# Altium PCB picphlipvfdnew.PcbDoc (part 2 of 2)
Units mm, origin at the board's own origin, x right, y up, seen from the top; angles counter-clockwise.
Board outline 243.3 x 58.75 mm, 4 copper layers (Top Layer, Internal Plane 1, Internal Plane 2, Bottom Layer); 81 components, 82 nets, 400 pads, 146 vias.
Unrouted connection lines stored in the file: 61.
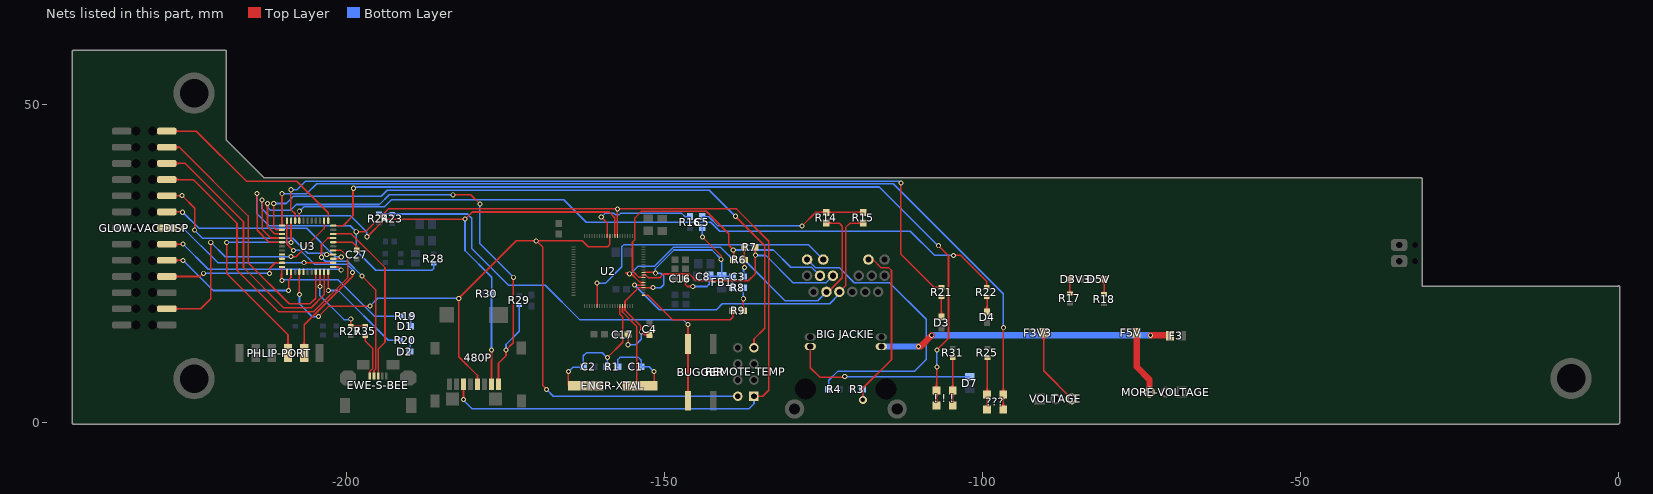
[diagram p4: the nets of this part, all layers, seen from the top]

## Via types
v1: diameter 0.8, hole 0.5, Top Layer to Bottom Layer, 145 vias
v2: diameter 1.27, hole 0.711, Top Layer to Bottom Layer, 1 vias

## Nets (pads, with @x,y where several pads share a name; then routed paths per layer and width w, separated by ;. In a path a pad name is that pad's centre, name@x,y a point inside that pad or via, vN(x,y) a via of type N, cw(c..) or ccw(c..) an arc to the next point about the centre after c; other vN are vias at no path point) (continued)
GNDA: C3.1 C4.2 C5.2 C8.2 C16.2 C17.2 FB1.1 R8.1 U2.4 U2.10 U2.77 | length 60.8
  Top Layer w0.25: C17.2@-155.8,13.9 v1(-155.8,12.288) v1@-155.715,12.203 ; U2.10@-153.376,23.678 -151.603,23.678 v1@-151.575,23.65 ; C4.2@-152.702,13.647 ccw(c-153.275,13.124) -153.275,13.9 ; C4.2@-152.702,14.153 cw(c-153.275,14.676) -153.275,13.9 ; C4.2@-152.425,13.9 -153.275,13.9 ; v1(-151.9,21.3) -151.922,21.278 U2.4@-153.376,21.278 -154.147,21.278 -156.276,19.149 U2.77@-156.276,18.378 -156.276,17.701 -153.775,15.2 -153.775,14.4 -153.275,13.9 ; C16.2@-147.034,22.378 cw(c-147.608,21.775) -146.775,21.775 ; C16.2@-146.775,22.65 -146.775,21.775 ; C16.2@-146.516,22.378 ccw(c-145.942,21.775) -146.775,21.775 ; v1(-145.615,21.453) -146.453,21.453 -146.775,21.775 ; v1(-144.09,29.228) -141.175,26.313 v1@-141.175,25.775
  Bottom Layer w0.25: v1(-155.8,12.288) -154.587,12.288 -153.725,13.15 v1@-153.725,14.3 ; v1(-151.9,21.3) -151.875,21.275 -150.65,21.275 -150.2,21.725 -150.2,23.1 -150.65,23.55 v1(-151.5,23.55) -151.5,24.275 -148.575,27.2 -142.6,27.2 -141.075,25.675 FB1.1@-141.075,23.05 -139.675,23.05 -139.425,23.3 R8.1@-139.425,21.3 ; v1(-145.615,21.453) -143.372,21.453 -143.025,21.8 C8.2@-143.025,23.025 -141.6,23.025 FB1.1@-141.3,23.325 ; v1@-144.125,29.3 C5.2@-144.125,30.95
  other v1: -153.715,14.328 -141.165,25.728
LINK_LED: "BIG JACKIE.15" U2.66 | length 44.9
  Top Layer w0.25: U2.66@-160.676,18.378 -160.676,22.161 -160.675,22.16 v1(-160.675,22.025)
  Bottom Layer w0.25: v1@-160.675,21.975 -159.363,21.975 -156.775,24.563 -156.775,27.716 -156.503,27.988 -127.401,27.988 -125.106,25.693 ; v1(-160.675,22.025) v1@-160.675,22.16
MISO: 480P.6 R28.1 REMOTE-TEMP.1 U2.27 U3.27 | length 196.9
  Top Layer w0: v1@-157.502,33.402 v1@-157.475,33.375
  Top Layer w0.25: v1(-214.15,36.075) -214.119,36.044 -214.119,30.279 -212.265,28.425 U3.27@-210.225,28.425 ; v1(-198.55,30.05) -197.1,30.05 -193.5,33.65 -138.75,33.65 -133.675,28.575 -133.675,5.125 -134.6,4.2 REMOTE-TEMP.1@-136,4.2 ; v1@-181.734,3.62 v1(-181.675,3.68) 480P.6@-181.675,6.05 ; v1@-157.502,33.675 v1(-157.477,33.65) ; U2.27@-157.476,29.378 v1@-157.476,33.402
  Bottom Layer w0.25: v1(-214.15,36.075) -214.15,32.875 -212.275,31 -199.5,31 v1(-198.55,30.05) -198.55,27.075 -195.475,24 -186.675,24 -186.375,24.3 R28.1@-186.375,25.1 ; v1(-181.675,3.68) -181.734,3.62 -180.314,2.2 -136.825,2.2 -136,3.025 REMOTE-TEMP.1@-136,4.2
MOSI: 480P.2 R30.2 U2.28 U3.26 | length 99.9
  Top Layer w0.25: v1@-213.5,35.075 -213.35,34.925 -213.35,30.45 -211.975,29.075 U3.26@-210.225,29.075 ; v1@-196.875,29.2 -194.022,32.053 v1(-181.44,32.053) ; v1@-181.275,32.2 -180.3,33.175 -158.775,33.175 -157.876,32.276 U2.28@-157.876,29.378 ; 480P.2@-177.275,6.05 v1(-177.275,11.45)
  Bottom Layer w0.25: v1(-213.375,35.075) -213.375,33.675 -212.296,32.596 -199.446,32.596 -196.925,30.075 v1@-196.925,29.375 ; v1(-181.44,32.053) -181.44,27.115 -177.25,22.925 R30.2@-177.25,20.35 ; v1(-177.275,11.45) -177.275,20.275 R30.2@-177.175,20.375
  other v1: -196.865,29.278
NetC3_2: C3.2 R6.2 R7.2 | length 7.4
  Top Layer w0.25: R7.2@-137.79,27.36 cw(c-138.43,26.72) -137.525,26.72 cw(c-136.62,26.72) R7.2@-137.26,27.36 ; R6.2@-137.765,25.89 ccw(c-138.345,26.47) -137.525,26.47 ; R6.2@-137.525,25.65 R7.2@-137.525,27.625 ; -137.525,26.591 ccw(c-136.534,26.591) R6.2@-137.235,25.89 ; v1@-137.5,24.5 R6.2@-137.5,25.625
  Bottom Layer w0.25: C3.2@-137.65,23.025 -137.65,24.275 v1(-137.5,24.425)
NetC5_1: C5.1 R14.1 R15.1 | length 31.1
  Top Layer w0.25: v1(-128.445,30.976) -126.295,33.126 R14.1@-124.655,33.126 R15.1@-118.813,33.126 ; R14.1@-124.92,32.861 ccw(c-125.56,32.221) -125.56,33.126 ccw(c-125.56,34.031) R14.1@-124.92,33.391 ; R14.1@-124.39,32.861 cw(c-123.75,32.221) -123.75,33.126 cw(c-123.75,34.031) R14.1@-124.39,33.391 ; R15.1@-119.078,32.861 ccw(c-119.718,32.221) -119.718,33.126 ccw(c-119.718,34.031) R15.1@-119.078,33.391
  Bottom Layer w0.25: C5.1@-144.125,32.425 -143.1,32.425 -141.651,30.976 v1(-128.445,30.976)
NetC27_2: C27.2 U3.7 | length 5.5
  Top Layer w0.25: U3.7@-202.175,28.425 -199.125,28.425 -198.475,27.775 ; C27.2@-198.661,27.353 ccw(c-199.048,27.775) -198.475,27.775 ; C27.2@-198.475,27.15 -198.475,27.775 ; C27.2@-198.289,27.353 cw(c-197.902,27.775) -198.475,27.775
NetD1_1: D1.1 R19.2 | length 1.6
  Bottom Layer w0.25: D1.1@-190,15.175 R19.2@-190,16.75
NetD2_1: D2.1 R20.2 | length 1.8
  Bottom Layer w0.25: D2.1@-190.075,11.225 R20.2@-190.075,13
NetD3_1: D3.1 R21.2 | length 5.5
  Top Layer w0.25: D3.1@-106.765,16.94 ccw(c-107.345,17.52) -106.525,17.52 ; R21.2@-106.659,19.666 cw(c-106.983,19.342) -106.525,19.342 ; -106.525,17.641 ccw(c-105.534,17.641) D3.1@-106.235,16.94 ; -106.525,19.222 cw(c-105.896,19.222) R21.2@-106.341,19.666 ; D3.1@-106.5,16.625 -106.5,16.676 -106.525,16.676 -106.525,19.825 R21.2@-106.5,19.825
NetD3V3_1: D3V3.1 R17.2 | length 4.5
  Top Layer w0.25: D3V3.1@-86.591,22.338 cw(c-87.231,21.698) -86.326,21.698 cw(c-85.421,21.698) D3V3.1@-86.061,22.338 ; R17.2@-86.459,20.509 ccw(c-86.781,20.831) -86.326,20.831 ; -86.326,20.956 ccw(c-85.694,20.956) R17.2@-86.141,20.509 ; D3V3.1@-86.326,22.603 -86.326,20.41 R17.2@-86.3,20.384
NetD4_1: D4.1 R22.2 | length 4.7
  Top Layer w0.25: D4.1@-99.615,17.79 ccw(c-100.287,18.462) -99.337,18.462 ; R22.2@-99.459,19.666 cw(c-99.754,19.371) -99.337,19.371 ; R22.2@-99.4,19.825 -99.337,19.825 -99.337,17.527 -99.35,17.514 D4.1@-99.35,17.475 ; -99.337,18.399 ccw(c-98.476,18.399) D4.1@-99.085,17.79 ; -99.337,19.193 cw(c-98.668,19.193) R22.2@-99.141,19.666
NetD5V_1: D5V.1 R18.2 | length 4.4
  Top Layer w0.25: D5V.1@-81.215,22.335 cw(c-81.913,21.637) -80.926,21.637 ; R18.2@-81.109,20.384 ccw(c-81.551,20.826) -80.926,20.826 ; R18.2@-80.926,20.434 D5V.1@-80.926,22.603 ; -80.926,20.71 ccw(c-80.465,20.71) R18.2@-80.791,20.384 ; -80.926,21.753 cw(c-80.103,21.753) D5V.1@-80.685,22.335
NetD7_2: "BIG JACKIE.P4" D7.2 | length 28.7
  Top Layer w0.25: -127.138,12.028 -127.138,8.688 -125.625,7.175 v1@-122.05,7.175
  Bottom Layer w0.25: v1(-121.725,7.275) D7.2@-102.1,7.275
NetF3_1: "BIG JACKIE.P3" F3.1 | length 45.9
  Top Layer w1: v1(-110.106,12.028) -109.797,12.028 v1(-108.05,13.775) ; v1(-73.625,13.775) -70.65,13.775 F3.1@-70.575,13.7
  Bottom Layer w1: -115.962,12.028 v1(-110.106,12.028) ; v1@-107.79,13.775 v1(-73.625,13.775) v1@-73.575,13.775
NetF3V3_1: F3V3.1 VOLTAGE.3 | length 15.2
  Top Layer w0.25: F3V3.1@-90.796,13.682 cw(c-91.692,12.786) -90.425,12.786 cw(c-89.158,12.786) F3V3.1@-90.054,13.682 ; F3V3.1@-90.619,13.859 cw(c-91.089,13.389) -90.425,13.389 cw(c-89.761,13.389) F3V3.1@-90.231,13.859 ; F3V3.1@-90.425,14.153 -90.425,8.19 VOLTAGE.3@-86.01,3.775
NetF5V_1: F5V.1 MORE-VOLTAGE.3 | length 10.1
  Top Layer w1: F5V.1@-75.826,14.153 -75.826,8.826 -73.79,6.79 MORE-VOLTAGE.3@-73.79,4.85
NetMCLR_1: BUGGER.1 R23.2 R24.1 | length 74.8
  Top Layer w0.25: BUGGER.1@-146.64,4.815 ccw(c-147.28,5.455) -146.375,5.455 ccw(c-145.47,5.455) BUGGER.1@-146.11,4.815 ; BUGGER.1@-146.64,11.085 cw(c-147.28,10.445) -146.375,10.445 cw(c-145.47,10.445) BUGGER.1@-146.11,11.085 ; BUGGER.1@-146.64,13.715 ccw(c-147.28,14.355) -146.375,14.355 ccw(c-145.47,14.355) BUGGER.1@-146.11,13.715 ; BUGGER.1@-146.375,3.5 BUGGER.1@-146.375,12.4 v1(-146.375,15.482)
  Bottom Layer w0.25: R24.1@-194.975,32.875 -194.95,32.85 R23.2@-192.9,32.85 -181.05,32.85 -180.375,32.175 -180.375,27.425 -174.6,21.65 -168.825,21.65 -163.425,16.25 -147.143,16.25 v1(-146.375,15.482)
NetP1_3: GLOW-VAC-DISP.3 U3.13 | length 39.9
  Top Layer w0.25: GLOW-VAC-DISP.3@-228.328,17.946 -223.004,17.946 -221.425,19.525 v1(-221.425,28.4) ; GLOW-VAC-DISP.3@-227.049,17.657 cw(c-226.351,16.96) -226.351,17.946 cw(c-226.351,18.932) GLOW-VAC-DISP.3@-227.049,18.235 ; v1@-208.825,26.1 -208.075,26.1 -203.6,30.575 U3.13@-203.6,31.8
  Bottom Layer w0.25: v1@-221.45,28.45 -219.15,26.15 v1(-208.825,26.15)
NetP1_7: GLOW-VAC-DISP.7 U3.32 | length 21.1
  Top Layer w0.25: GLOW-VAC-DISP.7@-228.328,23.026 -223.099,23.026 v1@-222.575,23.55 ; GLOW-VAC-DISP.7@-227.049,22.737 cw(c-226.351,22.04) -226.351,23.026 cw(c-226.351,24.012) GLOW-VAC-DISP.7@-227.049,23.315 ; v1(-212.165,23.503) -212.165,24.31 -211.3,25.175 U3.32@-210.225,25.175
  Bottom Layer w0.25: v1(-222.59,23.528) -212.153,23.528 -212.15,23.525 v1@-212.125,23.525
NetP1_9: GLOW-VAC-DISP.9 U3.35 | length 25.8
  Top Layer w0.25: GLOW-VAC-DISP.9@-228.328,25.566 -228.318,25.576 v1@-226.059,25.576 ; GLOW-VAC-DISP.9@-227.049,25.277 cw(c-226.327,24.555) -226.327,25.576 ; GLOW-VAC-DISP.9@-227.049,25.855 ccw(c-226.376,26.527) -226.376,25.576 ; v1(-209.175,20.825) -209.175,22.475 -209,22.65 -208.8,22.85 U3.35@-208.8,23.75
  Bottom Layer w0.25: v1@-226.059,25.576 -226.059,25.6 -225.8,25.6 -221.025,20.825 v1(-209.175,20.825)
  other v1: -225.8,25.55
NetP1_11: GLOW-VAC-DISP.11 U3.1 | length 32.2
  Top Layer w0.25: GLOW-VAC-DISP.11@-228.328,28.106 v1@-225.725,28.106 ; GLOW-VAC-DISP.11@-227.049,27.817 cw(c-226.351,27.12) -226.351,28.106 cw(c-226.351,29.092) GLOW-VAC-DISP.11@-227.049,28.395 ; U3.1@-202.175,24.525 -201.325,24.525 v1@-200.875,24.075
  Bottom Layer w0.25: v1(-225.775,28.125) -221.798,24.148 -200.941,24.148 v1@-200.872,24.078
  other v1: -200.915,24.053
NetP1_13: GLOW-VAC-DISP.13 U3.2 | length 30.3
  Top Layer w0.25: GLOW-VAC-DISP.13@-228.728,30.646 GLOW-VAC-DISP.13@-228.328,30.646 v1@-225.846,30.646 ; GLOW-VAC-DISP.13@-227.049,30.357 cw(c-226.351,29.66) -226.351,30.646 cw(c-226.351,31.632) GLOW-VAC-DISP.13@-227.049,30.935 ; v1(-206.775,25.2) -206.75,25.175 U3.2@-202.175,25.175
  Bottom Layer w0.25: v1(-225.775,30.65) -220.3,25.175 v1@-206.775,25.175
NetP1_15: GLOW-VAC-DISP.15 U3.3 | length 32
  Top Layer w0.25: GLOW-VAC-DISP.15@-228.328,33.186 -225.626,33.186 v1@-225.657,33.218 ; U3.3@-202.175,25.825 -201.175,25.825 v1(-200.9,26.1)
  Bottom Layer w0.25: v1@-225.657,33.218 -225.657,32.982 -223.275,30.6 -206.35,30.6 -201.85,26.1 v1@-200.85,26.1
  other v1: -225.85,33.125
NetP1_17: GLOW-VAC-DISP.17 U3.4 | length 31.8
  Top Layer w0.25: GLOW-VAC-DISP.17@-228.328,35.726 v1@-226.286,35.726 ; v1(-225.95,35.75) -223.95,33.75 v1(-223.95,30.325) ; v1(-203.179,26.475) U3.4@-202.175,26.475
  Bottom Layer w0.25: v1@-224.025,30.35 -222.72,29.045 -208.533,29.045 -206.181,26.694 -203.398,26.694 v1(-203.179,26.475)
NetP1_19: GLOW-VAC-DISP.19 U3.5 | length 51.2
  Top Layer w0.25: GLOW-VAC-DISP.19@-228.328,38.266 -224.166,38.266 -217.3,31.4 -217.3,24 -210.775,17.475 -205.25,17.475 -199.85,22.875 -199.85,26.1 -200.875,27.125 U3.5@-202.175,27.125 ; GLOW-VAC-DISP.19@-227.049,37.977 cw(c-226.351,37.28) -226.351,38.266 cw(c-226.351,39.252) GLOW-VAC-DISP.19@-227.049,38.555
NetP1_21: GLOW-VAC-DISP.21 U3.43 | length 44.3
  Top Layer w0.25: GLOW-VAC-DISP.21@-228.328,40.806 -225.456,40.806 -216.275,31.625 -216.275,24.425 -209.975,18.125 -205.625,18.125 -203.6,20.15 U3.43@-203.6,23.75 ; GLOW-VAC-DISP.21@-227.049,40.517 cw(c-226.351,39.82) -226.351,40.806 cw(c-226.351,41.792) GLOW-VAC-DISP.21@-227.049,41.095
NetP1_23: GLOW-VAC-DISP.23 U3.41 | length 44
  Top Layer w0.25: GLOW-VAC-DISP.23@-228.328,43.346 -226.346,43.346 -215.55,32.55 -215.55,25.175 -209.1,18.725 -205.8,18.725 -204.91,19.615 -204.91,21.745 -204.9,21.755 U3.41@-204.9,23.75 ; GLOW-VAC-DISP.23@-227.049,43.057 cw(c-226.351,42.36) -226.351,43.346 cw(c-226.351,44.332) GLOW-VAC-DISP.23@-227.049,43.635
NetP1_25: GLOW-VAC-DISP.25@-228.328,45.886 U3.12 | length 33.5
  Top Layer w0.25: GLOW-VAC-DISP.25@-228.328,45.886 -223.711,45.886 -215.815,37.99 -207.89,37.99 -202.95,33.05 U3.12@-202.95,31.8 ; GLOW-VAC-DISP.25@-227.049,45.597 cw(c-226.351,44.9) -226.351,45.886 cw(c-226.351,46.872) GLOW-VAC-DISP.25@-227.049,46.175
NetPGRM_4: PHLIP-PORT.4 U3.21 | length 38
  Top Layer w0.25: v1(-218.92,28.385) -218.92,23.495 -209.28,13.855 PHLIP-PORT.4@-209.28,10.975 ; PHLIP-PORT.4@-209.651,12.096 ccw(c-210.547,12.992) -209.28,12.992 ccw(c-208.013,12.992) PHLIP-PORT.4@-208.909,12.096 ; PHLIP-PORT.4@-209.474,11.919 ccw(c-209.944,12.389) -209.28,12.389 ccw(c-208.616,12.389) PHLIP-PORT.4@-209.086,11.919 ; U3.21@-208.8,31.8 -208.8,28.4 v1(-208.785,28.385)
  Bottom Layer w0.25: v1(-218.92,28.385) v1(-208.785,28.385)
NetPGRM_5: PHLIP-PORT.5 U3.22 | length 35.3
  Top Layer w0.25: U3.22@-209.45,31.8 -209.45,28.106 v1@-208.447,27.103 ; v1(-208.425,27.125) v1@-208.338,27.125 ; PHLIP-PORT.5@-207.111,12.096 ccw(c-208.007,12.992) -206.74,12.992 ccw(c-205.473,12.992) PHLIP-PORT.5@-206.369,12.096 ; PHLIP-PORT.5@-206.934,11.919 ccw(c-207.404,12.389) -206.74,12.389 ccw(c-206.076,12.389) PHLIP-PORT.5@-206.546,11.919 ; PHLIP-PORT.5@-206.74,10.975 -206.74,15.435 -199.092,23.083 -199.092,23.651 v1(-199.11,23.651)
  Bottom Layer w0.25: v1(-208.425,27.125) -207.3,27.125 -205.15,24.975 -200.041,24.975 -198.905,23.839 -199.092,23.651 v1(-199.11,23.651)
NetR3_1: "BIG JACKIE.14" R3.1 | length 28.2
  Top Layer w0.25: v2(-118.875,3.625) -118.875,5.444 -114.374,9.945 -114.374,23.975 -114.774,24.375 -115.975,24.375 -117.293,25.693 -117.994,25.693
  Bottom Layer w0.2: v2@-118.901,3.651 v2(-118.875,3.625)
  Bottom Layer w0.25: v2@-118.901,3.651 R3.1@-118.901,5.303
NetR4_1: "BIG JACKIE.16" R4.1 | length 47
  Bottom Layer w0.25: -127.646,25.693 -127.631,25.693 -126.338,24.4 -122.555,24.4 -120.208,22.054 -114.671,22.054 -108.925,16.307 -108.925,9.958 -110.783,8.1 -122.85,8.1 -124.251,6.699 R4.1@-124.251,5.303
NetR8_2: R8.2 R9.1 | length 5.1
  Top Layer w0.25: R9.1@-137.94,17.89 ccw(c-138.58,18.53) -137.675,18.53 ccw(c-136.77,18.53) R9.1@-137.41,17.89 ; v1(-137.675,19.525) -137.675,17.7 R9.1@-137.6,17.625
  Bottom Layer w0.25: v1@-137.7,19.55 -137.675,19.575 R8.2@-137.675,21.25
NetR19_1: R19.1 U3.33 | length 23.3
  Top Layer w0.25: v1@-210.3,22.45 U3.33@-210.275,24.525
  Bottom Layer w0.25: v1(-210.24,22.378) -210.111,22.507 -201.407,22.507 -195.65,16.75 R19.1@-191.5,16.75
NetR20_1: R20.1 U3.44 | length 17.5
  Top Layer w0.25: v1@-202.95,20.85 U3.44@-202.95,23.75
  Bottom Layer w0.25: v1(-202.94,20.828) -201.353,20.828 -193.525,13 R20.1@-191.575,13
NetR21_1: R21.1 U3.20 | length 122.3
  Top Layer w0.25: v1(-208.825,36.675) -208.825,33.575 -208.15,32.9 U3.20@-208.15,31.8 ; v1(-112.9,37.733) -112.9,26.557 -107.668,21.325 R21.1@-106.5,21.325 ; R21.1@-106.759,21.166 ccw(c-107.143,20.782) -107.143,21.325 ccw(c-107.143,21.868) R21.1@-106.759,21.484
  Bottom Layer w0.25: v1(-208.825,36.675) -208.8,36.7 -207.825,36.7 -206.538,37.987 -113.154,37.987 v1(-112.9,37.733)
NetR22_1: R22.1 U3.19 | length 117.5
  Top Layer w0.25: U3.19@-207.5,31.8 v1(-207.5,33.3) v1@-207.4,33.4 ; v1(-104.6,26.35) -104.55,26.4 -103.55,26.4 -99.4,22.25 R22.1@-99.4,21.325 R22.1@-99.388,21.325 ; R22.1@-99.559,21.484 ccw(c-99.943,21.868) -99.4,21.868 ccw(c-98.857,21.868) R22.1@-99.241,21.484
  Bottom Layer w0.25: v1@-207.37,33.4 -206.797,33.973 -194.127,33.973 -193,35.1 -165.925,35.1 -162.375,31.55 -142.786,31.55 -141.399,30.163 -111.413,30.163 -107.6,26.35 v1(-104.6,26.35)
NetR25_1: ???.2 R25.1 | length 15.7
  Top Layer w0.25: ???.2@-99.692,2.477 ccw(c-100.601,3.386) -99.315,3.386 ; ???.2@-99.692,4.11 cw(c-100.601,3.201) -99.315,3.201 ; ???.2@-99.692,4.813 ccw(c-100.601,5.723) -99.315,5.723 ; ???.2@-99.515,2.3 ccw(c-99.997,2.782) -99.315,2.782 ; ???.2@-99.515,4.287 cw(c-99.997,3.804) -99.315,3.804 ; ???.2@-99.515,4.637 ccw(c-99.997,5.119) -99.315,5.119 ; R25.1@-99.434,10.116 cw(c-99.722,9.828) -99.315,9.828 ; ???.2@-99.315,2.725 -99.315,5.062 -99.315,10.235 R25.1@-99.275,10.275 ; -99.315,3.265 ccw(c-98.2,3.265) ???.2@-98.988,2.477 ; -99.315,3.322 cw(c-98.2,3.322) ???.2@-98.988,4.11 ; -99.315,5.602 ccw(c-98.2,5.602) ???.2@-98.988,4.813 ; -99.315,9.635 cw(c-98.635,9.635) R25.1@-99.116,10.116
NetR27_2: R27.2 R35.1 U3.42 | length 16.2
  Top Layer w0.25: v1@-204.25,21.6 U3.42@-204.25,23.75 ; R27.2@-199.559,15.359 ccw(c-199.943,15.743) -199.4,15.743 ccw(c-198.857,15.743) R27.2@-199.241,15.359 ; v1@-199.325,16.4 v1(-199.4,16.325) R27.2@-199.4,15.2 -199.375,15.175 R35.1@-197.125,15.175 ; R27.2@-199.141,15.041 cw(c-198.817,14.717) -198.817,15.175 ; R27.2@-199.141,15.359 ccw(c-198.697,15.803) -198.697,15.175 ; R35.1@-197.384,15.016 ccw(c-197.768,14.632) -197.768,15.175 ccw(c-197.768,15.718) R35.1@-197.384,15.334
  Bottom Layer w0.25: v1(-204.265,21.478) -204.265,20.04 -200.475,16.25 v1@-199.325,16.25
NetR29_2: 480P.1 R29.2 U3.25 | length 82.6
  Top Layer w0.25: v1@-212.8,34.6 -212.5,34.3 -212.5,30.85 -211.375,29.725 U3.25@-210.225,29.725 ; v1(-183.325,35.875) -180.537,35.875 v1(-179.09,34.428) ; 480P.1@-176.369,6.744 ccw(c-176.839,7.214) -176.175,7.214 ccw(c-175.511,7.214) 480P.1@-175.981,6.744 ; 480P.1@-176.175,6.05 -176.175,9.4 -175,10.575 v1(-175,11.45) -173.85,12.6 -173.85,22.875 v1(-173.825,22.9)
  Bottom Layer w0.25: v1@-212.437,34.5 v1(-212.5,34.5) -212.5,33.9 -212.025,33.425 -208.9,33.425 -207.975,34.35 -194.9,34.35 -193.35,35.9 -183.683,35.9 v1@-183.533,35.75 ; v1@-179.1,34.15 -179.1,28.175 v1(-173.825,22.9) ; v1(-175,11.45) -175,12.35 -172.925,14.425 R29.2@-172.925,18.575
NetR31_1: "! ! !.2" R31.1 | length 13.5
  Top Layer w0.25: -105.087,3.09 ccw(c-105.936,3.939) -104.735,3.939 ccw(c-103.534,3.939) -104.383,3.09 ; -105.087,4.723 cw(c-105.936,3.874) -104.735,3.874 cw(c-103.534,3.874) -104.383,4.723 ; -105.087,5.427 ccw(c-105.936,6.276) -104.735,6.276 ccw(c-103.534,6.276) -104.383,5.427 ; R31.1@-104.884,10.116 cw(c-105.244,9.756) -104.735,9.756 ; -104.735,3.313 -104.735,5.65 -104.735,10.265 R31.1@-104.725,10.275 R31.1@-104.71,10.26 ; -104.735,9.708 cw(c-104.158,9.708) R31.1@-104.566,10.116
NetR35_2: EWE-S-BEE.1 R35.2 | length 7.8
  Top Layer w0.25: R35.2@-197.284,13.516 cw(c-197.668,13.132) -197.125,13.132 cw(c-196.582,13.132) R35.2@-196.966,13.516 ; R35.2@-197.125,13.675 -197.125,12.875 -195.925,11.675 -195.925,8.579 -196.4,8.104 EWE-S-BEE.1@-196.4,7.375
NetS1_1: ???.1 U3.23 | length 151.6
  Top Layer w0.25: U3.23@-210.225,31.025 v1(-210.225,36.05) ; ???.1@-97.152,2.477 ccw(c-98.061,3.386) -96.775,3.386 ; ???.1@-97.152,4.11 cw(c-98.061,3.201) -96.775,3.201 ; ???.1@-97.152,4.813 ccw(c-98.061,5.723) -96.775,5.723 ; ???.1@-96.975,2.3 ccw(c-97.457,2.782) -96.775,2.782 ; ???.1@-96.975,4.287 cw(c-97.457,3.804) -96.775,3.804 ; ???.1@-96.975,4.637 ccw(c-97.457,5.119) -96.775,5.119 ; ???.1@-96.775,2.725 -96.775,5.062 v1@-96.775,14.7 ; -96.775,3.265 ccw(c-95.66,3.265) ???.1@-96.448,2.477 ; -96.775,3.322 cw(c-95.66,3.322) ???.1@-96.448,4.11 ; -96.775,5.602 ccw(c-95.66,5.602) ???.1@-96.448,4.813
  Bottom Layer w0.25: v1(-210.225,36.05) -210.225,36.025 -210.275,35.975 -210.35,35.975 -210.375,35.95 -210.223,35.95 -210.153,36.02 -206.355,36.02 -204.767,37.608 -193.596,37.608 ; -193.593,37.606 -114.08,37.606 -96.8,20.325 -96.8,14.875 v1@-96.575,14.875
  other v1: -96.75,14.975
NetS2_1: "! ! !.1" U3.11 | length 135.9
  Top Layer w0.25: U3.11@-202.175,31.025 -200.609,31.025 -199.05,32.584 v1@-199.05,36.9 ; -107.627,3.09 ccw(c-108.476,3.939) -107.275,3.939 ccw(c-106.074,3.939) -106.923,3.09 ; -107.627,4.723 cw(c-108.476,3.874) -107.275,3.874 cw(c-106.074,3.874) -106.923,4.723 ; -107.627,5.427 ccw(c-108.476,6.276) -107.275,6.276 ccw(c-106.074,6.276) -106.923,5.427 ; -107.275,3.313 -107.275,8.825 v1@-107.25,8.85 ; v1(-107.212,11.488) -105.4,13.3 -105.4,26.3 v1(-106.975,27.875)
  Bottom Layer w0.25: v1(-199,36.9) -199,36.65 -198.55,37.1 -116.275,37.1 -107.275,28.1 v1@-107,28.1 ; v1(-107.237,8.813) -107.237,11.463 v1(-107.212,11.488)
NetTEMP_7: REMOTE-TEMP.7 U3.24 | length 103.8
  Top Layer w0.25: v1@-211.525,34.575 v1(-211.525,34.5) -211.525,30.725 -211.175,30.375 U3.24@-210.225,30.375 ; v1(-138.925,32.5) -134.3,27.875 -134.3,14.9 -136,13.2 REMOTE-TEMP.7@-136,11.82
  Bottom Layer w0.25: v1(-211.525,34.5) -209.55,34.5 -208.4,35.65 -194.6,35.65 -193.65,36.6 -143.025,36.6 -140.897,34.472 v1(-138.925,32.5)
NetU3_8: EWE-S-BEE.2 U3.8 | length 28.6
  Top Layer w0.25: v1(-204.01,26.049) -204.01,28.065 -203,29.075 U3.8@-202.175,29.075 ; v1(-197.65,23.1) -195.5,20.95 -195.5,8.48 -195.75,8.23 EWE-S-BEE.2@-195.75,7.375
  Bottom Layer w0.25: v1(-204.01,26.049) -203.401,25.439 -199.964,25.439 v1@-197.637,23.113
NetU3_9: EWE-S-BEE.3 U3.9 | length 27.8
  Top Layer w0.25: U3.9@-202.175,29.725 -199.325,29.725 -194.028,24.428 -194.028,12.697 -195.1,11.625 EWE-S-BEE.3@-195.1,7.375
NetU3_30: U3.30
NetU3_31: U3.31
NetU3_34: U3.34
NetU3_38: U3.38
RSET_BG: R9.2 U2.1 | length 18.2
  Top Layer w0.25: U2.1@-153.376,20.078 -152.653,20.078 -148.8,16.225 -139.725,16.225 -139.325,16.625 -139.325,17.2 R9.2@-139.625,17.5 ; R9.2@-139.59,17.36 cw(c-140.23,16.72) -139.325,16.72 cw(c-138.42,16.72) R9.2@-139.06,17.36
RXIN: "BIG JACKIE.5" R14.2 U2.6 | length 56.5
  Top Layer w0.25: v1(-155.55,23.45) -156.025,23.45 -156.175,23.6 -155.435,23.6 -153.913,22.078 U2.6@-153.376,22.078 ; R14.2@-124.655,31.426 -122.603,31.426 -122.125,30.948 -122.125,22.825 -124.337,20.613 -124.598,20.613 ; R14.2@-124.39,31.161 cw(c-123.75,30.521) -123.75,31.426 cw(c-123.75,32.331) R14.2@-124.39,31.691
  Bottom Layer w0.25: v1@-155.613,23.513 -155.387,23.513 -154.25,24.65 -151.656,24.65 -148.706,27.6 -141.225,27.6 -138.875,25.25 -137.133,25.25 -131.108,19.225 -125.986,19.225 -124.598,20.613
RXIP: "BIG JACKIE.4" R15.2 U2.5 | length 51.8
  Top Layer w0.25: v1@-154.685,21.908 -154.455,21.678 U2.5@-153.376,21.678 ; -122.566,20.613 -121.587,21.592 -121.587,30.715 -120.876,31.426 R15.2@-118.813,31.426 ; R15.2@-119.078,31.161 ccw(c-119.718,30.521) -119.718,31.426 ccw(c-119.718,32.331) R15.2@-119.078,31.691
  Bottom Layer w0.25: v1@-154.685,21.908 -154.685,21.591 -150.906,17.812 -141.904,17.812 -140.991,18.725 -124.1,18.725 -122.566,20.259 -122.566,20.613
  other v1: -154.775,21.7
SCLK: 480P.4 REMOTE-TEMP.2 U2.30 U3.37 | length 130.9
  Top Layer w0.25: U3.37@-207.5,23.75 -207.5,20.2 v1(-207.475,20.175) ; v1(-204.465,16.753) -202.843,18.375 -196.375,18.375 v1@-196.225,18.525 ; 480P.4@-179.475,6.05 -179.475,7.475 -182.425,10.425 v1(-182.425,19.575) -182.425,19.625 -173.385,28.665 v1@-170.228,28.665 ; v1(-168.625,5.275) -169.225,5.875 -169.225,27.662 v1@-170.228,28.665 ; U2.30@-158.676,29.378 -158.676,28.049 -159,27.725 -162.08,27.725 -163.02,28.665 v1@-170.228,28.665
  Bottom Layer w0.25: v1(-207.475,20.175) -207.475,18.725 -205.462,16.712 v1@-204.588,16.712 ; v1(-196.365,18.403) -195.156,19.612 v1@-182.463,19.612 ; v1(-168.625,5.275) -167.55,4.2 REMOTE-TEMP.2@-138.54,4.2
  other v1: -170.25,28.6
SPI_EN: R16.2 U2.31 | length 18
  Top Layer w0.25: v1(-160.017,32.373) -159.076,31.432 U2.31@-159.076,29.378
  Bottom Layer w0.25: v1(-160.017,32.373) -159.441,32.95 -157.962,32.95 -157.742,32.73 -157.208,32.73 -156.988,32.95 -147.325,32.95 -147.325,32.925 -146.825,32.425 R16.2@-146.05,32.425
TXON: "BIG JACKIE.10" R7.1 U2.9 | length 37.7
  Top Layer w0.25: U2.9@-153.376,23.278 -153.05,23.278 -152.597,22.825 -150.828,22.825 -150.228,23.425 -146.154,23.425 -145.079,22.35 -136.9,22.35 -135.775,23.475 v1(-135.775,26.375) -135.825,26.425 R7.1@-135.825,27.625
  Bottom Layer w0.25: v1(-135.775,26.375) -135.775,26.39 -135.808,26.481 -135.779,26.482 -135.621,26.325 -134.117,26.325 -129.853,22.061 -124.674,22.061 -123.582,23.153
TXOP: "BIG JACKIE.11" R6.1 U2.8 | length 48.4
  Top Layer w0.25: U2.8@-153.376,22.878 -154.078,22.878 -154.905,23.705 -154.905,23.717 -155.1,23.912 -155.1,28.45 -154.725,28.825 -154.725,32.225 -153.67,33.28 -143.505,33.28 -139.975,29.75 -139.975,27.92 v1(-139.25,27.195) ; R6.1@-139.465,25.89 ccw(c-140.105,26.53) -139.2,26.53 ccw(c-138.295,26.53) R6.1@-138.935,25.89 ; R6.1@-139.2,25.625 v1@-139.2,27.145
  Bottom Layer w0.25: v1(-139.25,27.195) -132.944,27.195 -130.224,24.475 -126.936,24.475 -125.614,23.153
XTLN: C2.1 ENGR-XTAL.2 R1.1 U2.75 | length 24.1
  Top Layer w0.25: v1(-165.174,8.065) -165.174,5.828 ENGR-XTAL.2@-162.455,5.828 ; v1(-159.05,10.275) -156.65,12.675 -156.65,16.675 -157.076,17.101 U2.75@-157.076,18.378
  Bottom Layer w0.25: v1(-165.174,8.065) -164.464,8.775 C2.1@-162.9,8.775 ; C2.1@-162.825,8.85 -162.825,10.55 -162.35,11.025 -159.874,11.025 -159.101,10.252 R1.1@-159.101,8.853
XTLP: C1.1 ENGR-XTAL.1 R1.2 U2.76 | length 26.6
  Top Layer w0.25: U2.76@-156.676,18.378 -156.676,17.426 -154.425,15.175 -154.425,6.307 ENGR-XTAL.1@-153.946,5.828 -151.712,5.828 v1(-151.712,8.065)
  Bottom Layer w0.25: R1.2@-157.401,8.853 -157.401,9.974 -157.075,10.3 -154.175,10.3 -153.726,9.851 C1.1@-153.726,8.828 -152.474,8.828 v1(-151.712,8.065)
pads on no net: 480P.7 480P.8 480P.9 480P.10 480P.11 480P.12 480P.13 480P.14 480P.15 480P.16 "BIG JACKIE.2" "BIG JACKIE.3" "BIG JACKIE.8" "BIG JACKIE.9" "BIG JACKIE.26" "BIG JACKIE.27" "BIG JACKIE.28" "BIG JACKIE.29" "BIG JACKIE.P1" "BIG JACKIE.P2" EWE-S-BEE.5 EWE-S-BEE.6 EWE-S-BEE.7 EWE-S-BEE.8 EWE-S-BEE.9 EWE-S-BEE.10 EWE-S-BEE.11 GLOW-VAC-DISP.1 GLOW-VAC-DISP.2 GLOW-VAC-DISP.5 GLOW-VAC-DISP.25@-230.614,17.946 GLOW-VAC-DISP.26@-233.154,17.946 GLOW-VAC-DISP.27 GLOW-VAC-DISP.28 GLOW-VAC-DISP.29 GLOW-VAC-DISP.30 GLOW-VAC-DISP.31 GLOW-VAC-DISP.32 GLOW-VAC-DISP.33 GLOW-VAC-DISP.34 GLOW-VAC-DISP.35 GLOW-VAC-DISP.36 GLOW-VAC-DISP.37 GLOW-VAC-DISP.38 GLOW-VAC-DISP.39 GLOW-VAC-DISP.40 GLOW-VAC-DISP.41 GLOW-VAC-DISP.42 GLOW-VAC-DISP.43 GLOW-VAC-DISP.44 GLOW-VAC-DISP.45 GLOW-VAC-DISP.46 GLOW-VAC-DISP.47 GLOW-VAC-DISP.48 GLOW-VAC-DISP.49 GLOW-VAC-DISP.50 PHLIP-PORT.6 REMOTE-TEMP.3 REMOTE-TEMP.5 REMOTE-TEMP.6 SPARE-SUPPLY.0 U2.3 U2.58 U2.60 U2.61 U2.62 U2.67 U2.71 U2.72 U2.73 U2.78 U2.79 U2.80 U3.6 U3.14 U3.15
copper on no net:
  other v1: -225.49,39.278

## Polygon pours and split planes (outlines as drawn)
GND on Top Layer "Top Layer-No Net" (solid, remove dead copper, shelved, pour order 6): -243.05,58.45 -213.05,58.45 -213.05,38.52 -31.177,38.52 -31.05,38.393 -31.05,21.575 -0.157,21.575 0,21.418 0,0 -243,0 -243.05,-0.05
GND on Bottom Layer "Top Layer-No Net" (solid, remove dead copper, shelved, pour order 4): -243.05,58.45 -213.05,58.45 -213.05,38.393 -213.007,38.35 -31.275,38.35 -31.275,21.618 -31.05,21.393 -0.025,21.393 -0.025,0.025 0,0 -0.05,-0.05 -243.05,-0.05
no net on Internal Plane 1 (split plane): -219.483,44.496 -219.473,44.396 -219.444,44.3 -219.397,44.212 -219.334,44.135 -213.358,38.159 -213.281,38.096 -213.193,38.049 -213.097,38.02 -212.997,38.01 -31.433,38.01 -31.433,21.52 -31.423,21.421 -31.394,21.325 -31.347,21.237 -31.284,21.159 -31.206,21.096 -31.118,21.049 -31.022,21.02 -30.923,21.01 -0.383,21.01 -0.383,0.333 -242.667,0.333 -242.667,58.067 -219.483,58.067
no net on Internal Plane 2 (split plane): -219.483,44.496 -219.473,44.396 -219.444,44.3 -219.397,44.212 -219.334,44.135 -213.358,38.159 -213.281,38.096 -213.193,38.049 -213.097,38.02 -212.997,38.01 -31.433,38.01 -31.433,21.52 -31.423,21.421 -31.394,21.325 -31.347,21.237 -31.284,21.159 -31.206,21.096 -31.118,21.049 -31.022,21.02 -30.923,21.01 -0.383,21.01 -0.383,0.333 -242.667,0.333 -242.667,58.067 -219.483,58.067

## Keep-outs
Keep-Out Layer:
  lines w0.254: -0.05,-0.05 -243.05,-0.05 -243.05,58.45 -219.1,58.45 -219.1,44.443 -213.05,38.393 -31.05,38.393 -31.05,21.393 -0.025,21.393 0,21.418 0,0 ; -234.4,14.2 -234.35,14.15 -229.375,14.15 -229.325,14.2 -229.325,47.125 -229.4,47.2 -234.4,47.2 -234.4,14.2

## Silkscreen, mask and mechanical layers (free items; w line width, h text height)
Top Overlay:
  rectangle: -35.675,7.45 -30.5,9.275
  lines w0: -54.85,12.075 -54.475,11.7
  lines w0.254: -59.125,8.225 -57.25,8.225 ; -59,8.275 ccw(c-58.2,7.175) -59.3,6.375 -56.525,6.375 ; -58.325,15.675 -58.325,15 -58.05,14.725 -57.375,14.725 -57.975,15.325 -58.275,15.325 ; -58.175,6.175 -58.175,3.6 -56.275,5.5 -56.275,6.125 -56.525,6.375 ; -57.225,14.075 -57.025,14.075 -56.85,13.9 -56.85,14.075 -57.225,14.45 -57.225,14.575 -56.575,13.925 -56.575,13.45 ; -57.125,8.275 ccw(c-60.013,8.887) -59.4,11.775 cw(c-56.3,13.85) -58.375,16.95 ccw(c-58.25,18.825) -56.375,18.7 ; -57.025,8.175 -54.425,8.175 ccw(c-54.45,9.075) -53.55,9.1 ; -56.575,8.175 -56.575,13.45 ; -56.425,18.75 cw(c-55.8,18.125) -55.175,18.75 ccw(c-53.488,18.488) -53.75,16.8 -52.225,16.8 cw(c-54.375,14) -51.575,11.85 -53.05,11.85 ccw(c-53.025,11.375) -53.5,11.35 -53.5,9.15 ; -56.3,14.225 -55.975,14.225 cw(c-55.875,13.65) -55.3,13.75 -56.275,13.75 ; -56.275,14.575 -56.275,13.75 ; -55.625,8.175 -55.35,8.45 -55.25,8.45 -55.25,11.125 -55.2,11.175 -55.625,11.175 -55.4,11.4 -55.4,12.175 -55.45,12.225 ; -55.45,11.9 -55.45,12.225 ; -55.325,11.7 -54.2,11.7 -54.15,11.75 -54.15,12.175 -54.2,12.225 -54.525,12.225 -55.45,12.225 ; -55.225,12.575 -55.55,12.575 -56,12.125 -56,12.075 -55.625,11.7 -55.7,11.775 -55.7,12.1 -55.7,12.425 -55.45,12.175 -55.45,12.225 ; -54.85,12.075 -54.55,12.075 -54.925,11.7 -54.9,11.7 -54.575,12.025 -55.175,12.025 -55.125,12.075 -54.35,12.075 ; -54.725,8.325 -54.725,11.775 ; -54.725,11.25 cw(c-54.65,10.575) -54.151,10.114 ; -53.775,15.7 ccw(c-53.8,15.375) -54.125,15.4 -53.875,15.4 -53.275,14.8 ; -53.725,15.75 -52.525,15.75 ; -53.625,8.175 -51.825,6.375 ; -53.25,15.7 cw(c-53.588,15.138) -53.025,14.8 ; -53.1,6.375 -53.1,4.5 ccw(c-53,5.375) -52.125,5.275 ccw(c-52.825,5.225) -52.875,5.925 ; -53.05,7.275 -52.15,6.375 -51.825,6.375 ; -52.6,7.65 -52.45,7.65 ; -56.575,13.45 -56.275,13.75 ; -56.525,6.375 -51.825,6.375
  text "DO NOT SOLDER" at -99.475,34.8 h1.52
  text "THIS SPACE INTENTIONALLY" at -99.725,31.925 h1.52
  text "LEFT FREE OF ELECTRONICS" at -99.525,28.875 h1.52
  text "+5" at -40.775,27.575 h1.52
  text "Tubez Desk Display" at -48.05,14.375 h1.52
  text "Mark II - Series XVXXII" at -47.925,11.15 h1.52
  text "TFPLPG-0" at -47.875,7.6 h1.52
  text "VIVA_TUBEZ" at -48.05,1.175 h1.52
Bottom Overlay:
  lines w0.254: -188.2,26.575 -187.55,26.575 ; -187.875,26.225 -187.875,26.95
  text "SPACE FOR RENT" at -38.825,13.525 h1.52

## Text inside footprints (layer, text, board x,y; h text height)
480P: Top Overlay "SD CARD" at -179.629,0.614 h0.89; Top Overlay "8" at -185.268,5.618 h0.89; Top Overlay "1" at -174.854,5.618 h0.89
GLOW-VAC-DISP: Mechanical 1 "J1" at -225.966,32.362 h0.76 r90
MORE-VOLTAGE: Top Overlay "3" at -73.765,3.442 h0.51 r180; Top Overlay "2" at -71.025,3.515 h0.51 r180; Top Overlay "1" at -68.49,3.559 h0.51 r180
REMOTE-TEMP: Top Overlay "2" at -138.032,1.66 h1.27 r90; Top Overlay "1" at -135.492,2.168 h1.27 r90; Top Overlay "7" at -135.492,13.344 h1.27 r90; Top Overlay "8" at -138.032,13.344 h1.27 r90
VOLTAGE: Top Overlay "3" at -86.035,5.183 h0.51; Top Overlay "2" at -88.775,5.11 h0.51; Top Overlay "1" at -91.31,5.066 h0.51